# Altium PCB reflex_beta.PcbDoc (part 2 of 2)
Units mil, origin at the board's own origin, x right, y up, seen from the top; angles counter-clockwise.
Board outline 1299.21 x 1771.65 mil, 6 copper layers (Top Layer, Power Plane, Routing_1, Routing_2, Ground Plane, Bottom Layer), stack 48.468 mil thick; 106 components, 94 nets, 473 pads, 173 vias.
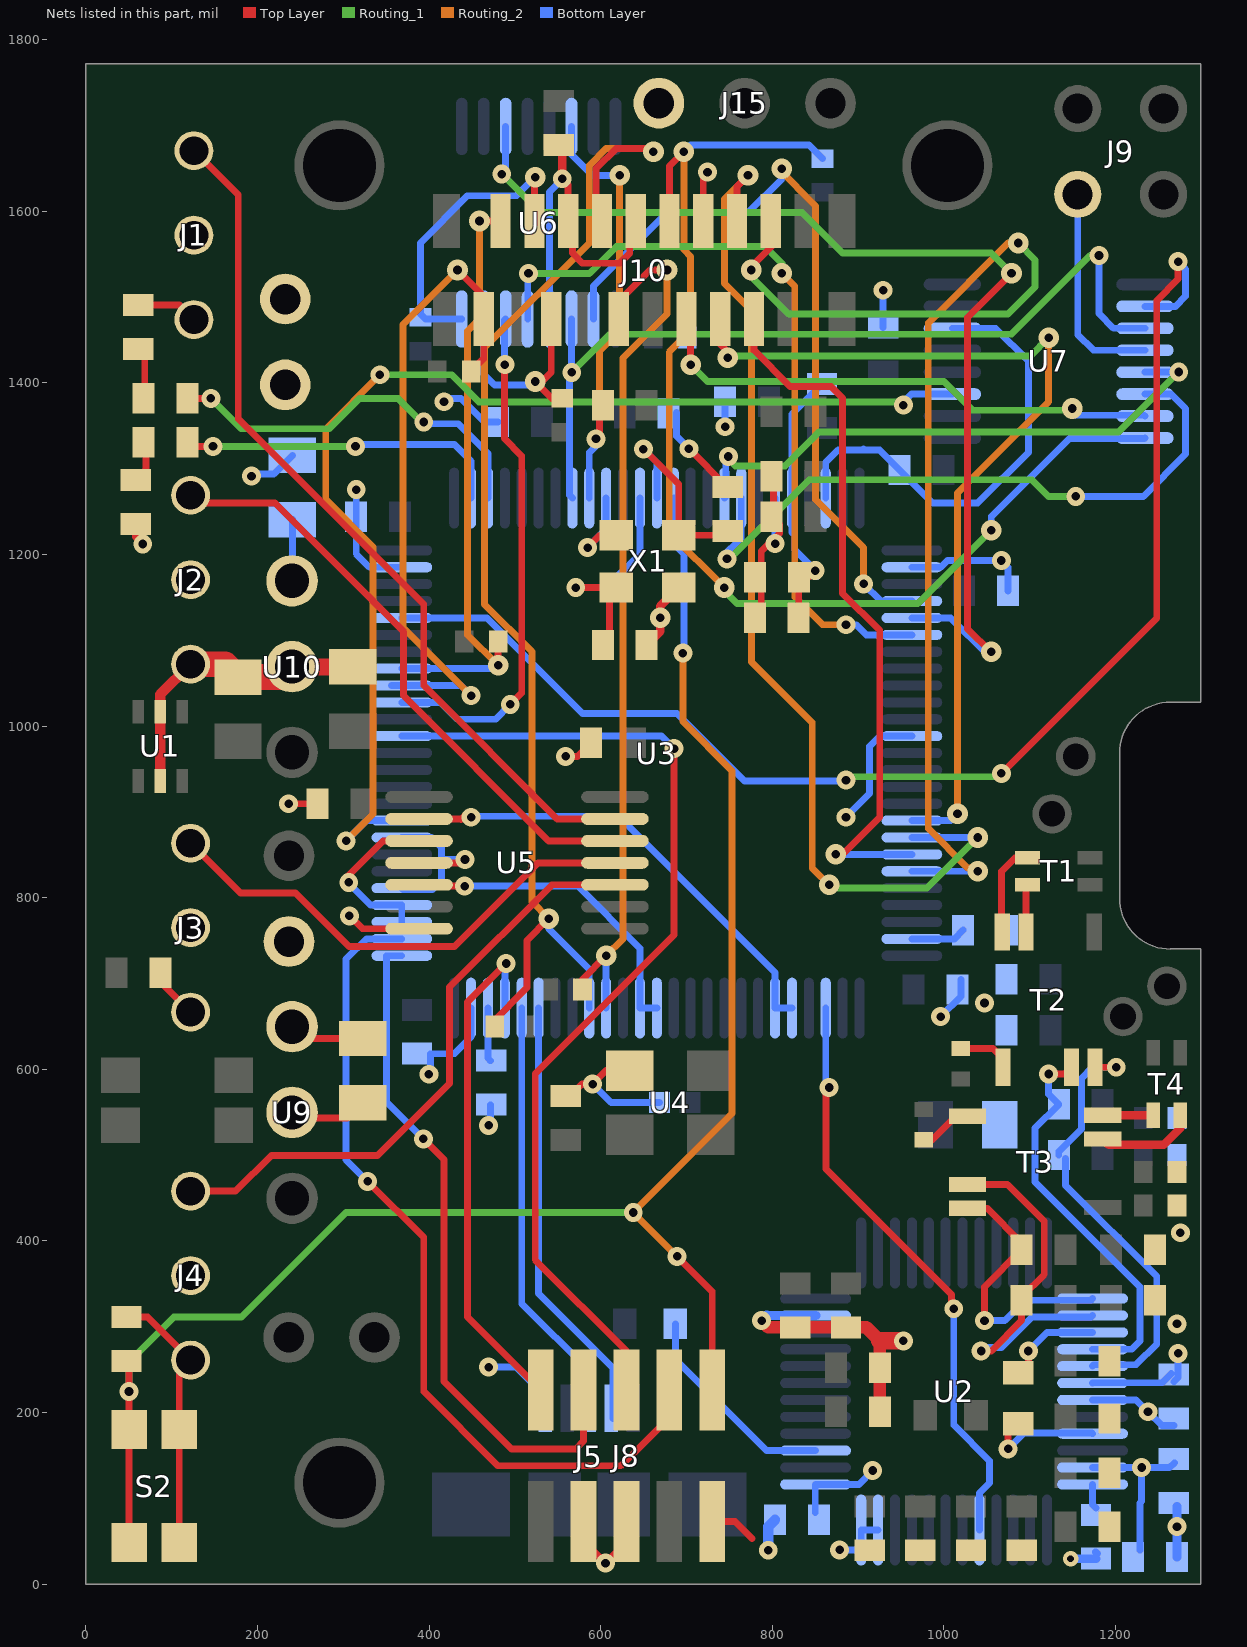
[diagram p6: the nets of this part, all layers, seen from the top]

## Via types
v1: diameter 22, hole 10, Top Layer to Bottom Layer, 110 vias
v2: diameter 24, hole 10, Top Layer to Bottom Layer, 18 vias
v3: diameter 22, hole 10, Top Layer to Bottom Layer, tented top, 16 vias
v4: diameter 24, hole 10, Top Layer to Bottom Layer, tented top, 13 vias
v5: diameter 22, hole 10, Top Layer to Bottom Layer, tented both sides, 9 vias
v6: diameter 24, hole 10, Top Layer to Bottom Layer, tented both sides, 3 vias
v7: diameter 22, hole 10, Top Layer to Bottom Layer, tented bottom, 2 vias
v8: diameter 26, hole 14, Top Layer to Bottom Layer, 1 vias
v9: diameter 18, hole 8, Top Layer to Bottom Layer, 1 vias

## Nets (pads, with @x,y where several pads share a name; then routed paths per layer and width w, separated by ;. In a path a pad name is that pad's centre, name@x,y a point inside that pad or via, vN(x,y) a via of type N, cw(c..) or ccw(c..) an arc to the next point about the centre after c; other vN are vias at no path point) (continued)
GND: C1.1 C2.1 C3.2 C4.1 C5.1 C6.1 C7.1 C8.1 C9.1 C10.1 C11.1 C12.1 C13.1 C14.1 C15.1 C16.1 C17.1 C18.1 C19.1 C20.1 C21.1 C22.1 C23.1 C24.1 C25.1 C26.1 C27.1 C28.1 C29.1 C30.1 C31.1 C32.1 C33.1 C34.1 C35.1 C36.1 C37.1 C38.1 C39.2 C40.2 C41.1 C42.1 C43.1 C44.2 C45.2 C46.2 C47.1 C48.1 C49.2 C50.2 J1.1 J2.1 J3.1 J4.1 J5.5 J6.2 J8.3 J8.5 J8.9 J9.2 J10.6 J10.10 J10.14 J11.2 J15.3 R4.1 R6.1 R9.1 R10.1 R11.1 R14.1 S2.2 U1.2 U1.5 U2.15 U2.19 U2.35 U2.36 U2.47 U3.10 U3.20 U3.27 U3.37 U3.74 U3.99 U4.2 U5.7 U6.4 U7.4 U9.2 U10.2 X1.2 X1.4 | length 4314.4
  Top Layer w8: C35.1@47.24,311.02 72.01,311.02 J4.1@121.93,261.1 108.76,247.93 S2.2@108.76,180.12 S2.2@108.76,48.23 ; R4.1@57.87,1235.43 57.87,1220.47 v1(66.14,1212.2) ; R6.1@61.02,1490.55 109.02,1490.55 J1.1@125.87,1473.7 ; R11.1@86.61,712.6 86.61,701.93 J3.1@121.93,666.61 ; v3(236.22,909.45) C46.2@269.69,909.45 ; U9.2@240.16,549.61 246.46,543.31 304.72,543.31 C44.2@322.44,561.02 ; v1(307.09,778.74) 322.05,763.78 U5.7@388.19,763.78 ; v1(555.12,1637.8) 562.01,1630.91 J10.6@562.01,1588.58 ; v1(559.06,964.57) 572.83,964.57 C47.1@588.58,980.32 ; R14.1@562.99,567.72 577.95,582.68 v1(590.55,582.68) 606.3,598.43 U4.2@633.86,598.43 ; J10.6@566.93,1578.74 566.93,1551.18 578.74,1539.37 622.05,1539.37 633.86,1551.18 J10.10@633.86,1574.8 ; J8.3@579.92,72.83 579.92,50 v1(605.51,24.41) 629.92,48.82 J8.5@629.92,72.83 ; v1(584.65,1207.87) 599.21,1222.44 X1.2@618.11,1222.44 ; J10.10@639.95,1587.79 J10.10@640.75,1588.58 ; X1.4@685.04,1155.51 X1.4@690.94,1161.42 ; v1(702.76,1323.23) 747.24,1278.74 C40.2@748.03,1278.74 ; J10.14@719.49,1588.58 719.49,1640.75 v3(724.41,1645.67) ; J8.9@729.92,72.83 756.69,72.83 776.38,53.15 ; C2.1@787.01,1125.59 787.01,1203.54 808.66,1225.2 808.66,1234.25 800.39,1242.52 801.18,1243.31 801.18,1287.01 C26.1@800.79,1287.4 ; v5(878.35,39.76) v5@878.74,39.37 ; R9.1@1086.61,246.06 1098.43,257.87 v1(1098.43,271.65)
  Top Layer w10: C41.1@551.18,1677.17 555.12,1673.23 v1(555.12,1637.8) ; C39.2@653.54,1094.49 669.29,1110.24 669.29,1139.76 X1.4@685.04,1155.51
  Top Layer w12: U1.2@86.61,936.02 86.61,1036.81 J2.1@121.93,1072.13
  Top Layer w15: v1(787.4,307.09) 795.28,299.21 C23.1@826.77,299.21 C24.1@885.83,299.21 909.45,299.21 925.2,283.46 C22.1@925.2,251.97 C21.1@925.2,200.79
  Top Layer w20: U10.2@240.55,1068.9 C49.2@311.02,1068.9 ; 925.2,283.46 v1(952.76,283.46)
  Top Layer w30: J2.1@121.93,1072.13 162.13,1072.13 C50.2@177.17,1057.09 228.74,1057.09 U10.2@240.55,1068.9
  Bottom Layer w8: v1@194.09,1293.7 218.9,1293.7 C45.2@240.55,1315.35 ; v1(314.96,1275.59) C10.1@314.96,1244.09 314.96,1200.79 330.71,1185.04 U3.99@368.11,1185.04 ; v1(399.61,594.09) 401.57,596.06 401.57,618.11 429.53,618.11 448.82,637.4 U3.74@448.82,671.26 ; v1@413.39,1381.89 437.01,1381.89 464.57,1354.33 C11.1@480.32,1354.33 ; v1(469.29,252.76) 501.18,252.76 535.43,218.5 J5.5@535.43,192.91 ; v1(469.29,534.65) 471.65,537.01 C37.1@471.65,558.66 ; U6.4@540.35,1474.41 540.35,1622.55 547.62,1629.82 547.62,1630.3 v1(555.12,1637.8) ; v1(584.65,1207.87) 606.3,1229.53 U3.10@606.3,1265.75 ; v1(590.55,582.68) 612.2,561.02 C36.1@668.5,561.02 ; C43.1@688.19,1365.35 688.19,1337.8 v1(702.76,1323.23) ; v1(744.88,1348.82) C12.1@744.88,1377.95 ; v1@803.15,1219.68 U3.20@803.15,1265.75 ; v5(878.35,39.76) 903.54,39.76 U2.36@903.54,62.99 U2.35@923.23,62.99 ; v1(885.83,893.7) 913.39,921.26 913.39,976.38 925.2,988.19 U3.37@962.6,988.19 ; C42.1@929.13,1464.57 v1(929.13,1507.87) ; U3.27@962.6,1185.04 996.06,1185.04 1004.16,1193.13 1066.71,1193.13 1074.8,1185.04 C7.1@1074.8,1157.48 ; v5(996.06,661.42) 1019.68,685.04 C8.1@1019.68,704.72 ; v1(1098.43,271.65) 1120.08,293.31 U2.15@1173.23,293.31 ; J9.2@1155.91,1619.68 1155.91,1456.3 1174.21,1437.99 U7.4@1234.25,1437.99 ; U2.19@1173.23,214.57 1224.02,214.57 v5(1237.8,200.79) 1253.94,184.65 C3.2@1268.11,184.65 ; R10.1@1176.38,37.4 1177.17,37.4 R10.1@1179.13,35.43
  Bottom Layer w10: v9(1147.64,29.53) R10.1@1177.17,29.53 ; C6.1@1271.65,31.5 v5(1271.65,66.93) C5.1@1271.65,90.55
  Bottom Layer w11: v1@793.31,312.99 U2.47@850.39,312.99
  Bottom Layer w12: v1(787.4,307.09) v1@793.31,312.99 ; v5(795.28,39.37) 795.28,66.93 C4.1@803.15,74.8
  other v1: 1271.65,303.15 1047.24,677.17 803.15,1212.6 192.91,1291.34 417.32,1377.95
  other v2: 669.29,1125.98
  other v3: 1066.93,1192.91
  other v7: 1275.59,409.45
I2C1_SCL: J10.1 R16.1 U3.92 | length 795.1
  Top Layer w8: v2(433.07,1531.49) 463.58,1500.98 J10.1@463.58,1474.41 463.58,1428.15 R16.1@448.82,1413.39
  Routing_2 w8: v2@437.01,1527.56 v2(433.07,1531.49) 369.52,1467.94 369.52,1114.73 v1(448.82,1035.43)
  Bottom Layer w8: U3.92@356.3,1047.24 U3.92@368.11,1047.24 437.01,1047.24 v1(448.82,1035.43)
I2C1_SDA: J10.2 R17.1 U3.93 | length 704.1
  Top Layer w8: v2(458.66,1588.58) J10.2@483.27,1588.58 ; v2(480.31,1070.86) R17.1@480.31,1098.43
  Routing_2 w8: v2(458.66,1588.58) 458.66,1474.41 444.88,1460.63 444.88,1106.3 v2(480.31,1070.86)
  Bottom Layer w8: U3.93@368.11,1066.93 476.38,1066.93 v2(480.31,1070.86)
I2C2_INT: R12.1 U3.9 U6.14 | length 547.1
  Top Layer w8: v1(594.49,1334.65) 598.43,1330.71 598.43,1370.08 R12.1@602.36,1374.02 R12.1@602.36,1370.08
  Routing_2 w8: v1(594.49,1334.65) 598.43,1338.58 598.43,1437.01 622.05,1460.63 v4(622.05,1641.73)
  Bottom Layer w8: U6.14@565.94,1698.82 565.94,1666.34 590.55,1641.73 v4(622.05,1641.73) ; U3.9@586.61,1265.75 586.61,1318.9 598.43,1330.71 v1(594.49,1334.65)
I2C2_SCL: J10.4 R18.1 U6.8 | length 350.6
  Top Layer w8: J10.4@522.64,1588.58 522.64,1638.78 v2(523.62,1639.76)
  Bottom Layer w8: U6.8@437.99,1474.41 395.67,1474.41 389.76,1480.31 389.76,1562.99 444.88,1618.11 501.97,1618.11 v2(523.62,1639.76)
I2C2_SDA: J10.5 R19.1 U6.7 | length 250.2
  Top Layer w8: J10.5@542.32,1474.41 542.32,1412.4 527.56,1397.64 543.31,1381.89 R19.1@555.12,1381.89
  Bottom Layer w8: U6.7@463.58,1474.41 463.58,1410.43 476.38,1397.64 v2@527.56,1397.64
  other v2: 523.62,1401.57
I2C3_SCL: J10.8 R20.1 U3.67 | length 1464.6
  Top Layer w8: R20.1@472.44,653.54 514.01,695.11 514.01,750.23 v2(539.37,775.59) ; J10.8@601.38,1588.58 594.49,1595.47 594.49,1649.61 618.11,1673.23 v4@665.35,1673.23
  Routing_2 w8: v2(539.37,775.59) 519.68,795.28 519.68,1086.61 464.57,1141.73 464.57,1440.94 586.61,1562.99 586.61,1653.54 606.3,1673.23 v4@665.35,1673.23
  Bottom Layer w8: v2(539.37,775.59) 539.37,763.78 586.61,716.54 U3.67@586.61,671.26
  other v4: 661.42,1669.29
I2C3_SDA: J10.9 R21.1 U3.66 | length 1032.4
  Top Layer w8: R21.1@578.74,692.91 578.74,704.72 v2(606.3,732.28) ; J10.9@621.06,1474.41 621.06,1495.32 657.24,1531.5 v2(677.17,1531.5)
  Routing_2 w8: v2(606.3,732.28) 625.98,751.97 625.98,1429.13 677.17,1480.31 v2(677.17,1531.5)
  Bottom Layer w8: U3.66@606.3,671.26 v2(606.3,732.28)
I2C4_INT: R15.1 U3.23 U7.14 | length 546.1
  Bottom Layer w8: U3.23@862.2,1265.75 862.2,1307.09 876.77,1321.65 925.11,1321.65 R15.1@948.34,1298.43 986.93,1259.84 1039.37,1259.84 1098.43,1318.9 1098.43,1425.2 1060.04,1463.58 U7.14@1009.84,1463.58 ; 905.12,1321.65 906.3,1322.83
I2C4_SCL: J10.12 R22.1 U7.8 | length 1401.9
  Top Layer w8: J10.12@680.12,1588.58 680.12,1652.56 v4(696.85,1669.29)
  Routing_1 w8: v2@748.03,1165.35 748.03,1153.54 758.83,1142.75 969.52,1142.75 v4(1055.12,1228.35)
  Routing_2 w8: v4@699.17,1666.97 v4(696.85,1669.29) 696.85,1555.12 704.72,1547.24 704.72,1460.63 679.76,1435.66 679.76,1225.76 v2(744.09,1161.42)
  Bottom Layer w8: v4(696.85,1669.29) 704.73,1677.17 842.52,1677.17 R22.1@858.27,1661.42 ; v4(1055.12,1228.35) 1055.12,1244.09 1146.06,1335.03 1233.66,1335.03 U7.8@1234.25,1335.63
I2C4_SDA: J10.13 R23.1 U7.7 | length 656
  Top Layer w8: J10.13@699.8,1484.25 699.8,1479.33 704.72,1474.41 v6(704.72,1421.26)
  Routing_1 w8: v6(704.72,1421.26) 724.41,1401.57 1000,1401.57 1033.46,1368.11 v4@1147.64,1368.11
  Bottom Layer w8: v6(704.72,1421.26) R23.1@704.72,1460.63 ; v4@1149.61,1366.14 1153.54,1362.2 1233.27,1362.2 U7.7@1234.25,1361.22
  other v4: 1149.61,1370.08
I2C_EXT_R\E\S\E\T: U3.8 U6.3 U7.3 | length 1010.6
  Routing_1 w8: v1(566.14,1412.2) 610.63,1456.69 1078.74,1456.69 1170.47,1548.43 v3(1180.71,1548.43)
  Bottom Layer w8: v1@565.94,1410.43 U6.3@565.94,1474.41 ; v1(566.14,1412.2) 563.61,1409.68 563.61,1269.06 U3.8@566.93,1265.75 ; v3@1180.71,1546.85 1180.71,1480.71 1197.83,1463.58 U7.3@1234.25,1463.58
LED0: D1.1 U3.2 | length 380.9
  Top Layer w8: D1.1@121.26,1331.89 127.17,1325.98 v1(148.03,1325.98)
  Routing_1 w8: v1(148.03,1325.98) v1(314.17,1325.98)
  Bottom Layer w8: v1@314.17,1327.95 429.53,1327.95 448.82,1308.66 U3.2@448.82,1265.75
LED1: D2.1 U3.3 | length 462
  Top Layer w8: D2.1@119.68,1382.28 120.08,1381.89 v1(145.67,1381.89)
  Routing_1 w8: v1(145.67,1381.89) 181.1,1346.46 283.46,1346.46 318.9,1381.89 363.77,1381.89 391.34,1354.33 v1(393.7,1354.33)
  Bottom Layer w8: v1@387.8,1352.36 433.86,1352.36 468.5,1317.72 U3.3@468.5,1265.75
MCU_NRST: C35.2 J8.10 S2.1 U3.14 | length 2061.1
  Top Layer w8: C35.2@47.24,259.84 50.2,256.89 v1(50.2,224.41) S2.1@50.2,180.12 S2.1@50.2,48.23 ; v1(688.98,381.89) 729.92,340.94 J8.10@729.92,226.38
  Routing_1 w8: v1(50.2,224.41) 50.2,258.86 102.36,311.02 181.1,311.02 303.15,433.07 v1(637.8,433.07) v1@639.37,433.07
  Routing_2 w8: v1(688.98,381.89) v1(637.8,433.07) 753.13,548.41 753.13,947.65 695.67,1005.12 v1(695.67,1085.04)
  Bottom Layer w8: U3.14@685.04,1265.75 685.04,1212.6 696.85,1200.79 696.85,1092.13 v1@692.91,1088.19
NetC1_2: C1.2 C2.2 R1.1 U3.21 | length 320.3
  Top Layer w8: C2.2@830.71,1126.77 C1.2@830.71,1173.23 ; C1.2@831.89,1174.41 C1.2@831.1,1173.62 842.52,1173.62 v1(850,1181.1) v1@850.39,1181.1
  Bottom Layer w8: v1@847.2,1179.57 v1@852.36,1174.41 ; v1(850,1181.1) 826.15,1204.95 826.15,1222.13 822.83,1225.44 U3.21@822.83,1265.75 822.83,1354.39 822.86,1363.41 R1.1@857.87,1398.43
NetC3_1: C3.1 C4.2 C5.2 C6.2 U2.18 U2.23 U2.37 | length 432.1
  Bottom Layer w8: C4.2@850,83.07 U2.37@850,115.75 ; U2.37@850.39,116.14 900.79,116.14 v1(916.93,132.28) ; U2.23@1173.23,135.83 1262.99,135.83 C5.2@1268.5,141.34 ; U2.18@1173.23,234.25 1173.51,234.54 1254.22,234.54 C3.1@1264.96,245.28 ; C6.2@1228.35,39.37 1228.35,94.49 1230.32,96.46 v5(1230.32,135.83) ; C3.1@1268.11,235.83 1272.83,240.55 v5(1272.83,268.9)
NetC37_2: C37.2 U3.73 | length 62.7
  Bottom Layer w8: U3.73@468.5,671.26 468.5,612.99 C37.2@471.65,609.84
NetC38_2: C38.2 U3.49 | length 64.1
  Bottom Layer w8: U3.49@962.6,751.97 1012.2,751.97 C38.2@1022.44,762.2
NetD1_2: D1.2 R4.2 | length 50.3
  Top Layer w8: R4.2@57.87,1286.61 70.08,1298.82 D1.2@70.08,1331.89
NetD2_2: D2.2 R6.2 | length 60.2
  Top Layer w8: R6.2@61.02,1439.37 68.5,1431.89 D2.2@68.5,1382.28
NetR9_2: R9.2 U2.21 | length 140.8
  Top Layer w8: v1(1074.8,157.48) 1074.8,175.2 R9.2@1086.61,187.01
  Bottom Layer w8: v1(1074.8,157.48) 1093.32,176 1172.43,176 U2.21@1173.23,175.2
NetR10_2: R10.2 U2.24 | length 29.2
  Bottom Layer w8: U2.24@1173.23,116.14 1173.23,92.52 R10.2@1177.17,88.58
NetR13_1: R13.1 U2.39 | length 248.8
  Bottom Layer w8: R13.1@687.01,303.15 687.01,261.81 793.31,155.51 U2.39@850.39,155.51
NetR24_1: R24.1 T2.3 | length 63.9
  Top Layer w8: R24.1@1019.68,624.02 1057.09,624.02 1068.9,612.2 T2.3@1068.9,602.36
NetR25_1: R25.1 T3.3 | length 62.6
  Top Layer w8: R25.1@976.38,517.72 986.22,517.72 1013.78,545.28 T3.3@1027.56,545.28
NetT1_1: T1.1 T2.4 | length 108.3
  Top Layer w8: T2.4@1067.91,759.84 1066.93,760.83 1066.93,830.71 1082.68,846.46 T1.1@1097.44,846.46
NetT1_2: T1.2 T2.5 | length 53.1
  Top Layer w8: T2.5@1095.47,759.84 T1.2@1095.47,812.99
NetT3_4: T3.4 T4.1 | length 59.1
  Top Layer w10: T3.4@1185.04,546.26 T4.1@1244.09,546.26
NetT3_5: T3.5 T4.2 | length 116.3
  Top Layer w10: T3.5@1185.04,518.7 1191.93,511.81 1255.91,511.81 1275.59,531.5 T4.2@1275.59,546.26
OSC_IN: C39.1 U3.12 X1.3 | length 250.6
  Top Layer w8: v1(570.87,1161.42) X1.3@618.11,1161.42 ; C39.1@610.24,1106.3 X1.3@610.24,1153.54
  Bottom Layer w8: v1(570.87,1161.42) 606.3,1161.42 645.67,1200.79 U3.12@645.67,1265.75
OSC_OUT: C40.1 U3.13 X1.1 | length 240.3
  Top Layer w8: v1(649.61,1322.83) 690.94,1281.5 X1.1@690.94,1222.44 742.91,1222.44 C40.1@748.03,1227.56
  Bottom Layer w8: v1(649.61,1322.83) 665.35,1307.09 U3.13@665.35,1265.75
PHY_RESET: U2.29 U3.53 | length 694.3
  Top Layer w8: v1@862.6,581.5 862.6,581.1 862.6,483.86 1008.86,337.6 1008.86,323.43 v1(1011.42,320.87)
  Bottom Layer w8: U3.53@862.2,671.26 862.2,581.5 862.6,581.1 v1@863.78,579.92 ; v1(1011.42,320.87) 1011.42,185.43 1053.17,143.69 1053.17,117.97 1041.34,106.14 U2.29@1041.34,62.99
  other v1: 866.14,578.74
PHY_RXM: R7.1 T3.1 U2.13 | length 324.8
  Top Layer w8: T3.1@1027.56,437.99 1050.2,437.99 1090.55,397.64 R7.1@1090.55,389.76 1047.24,346.46 v1(1047.24,307.09)
  Bottom Layer w8: v1(1047.24,307.09) 1070.87,307.09 1094.49,330.71 1171.26,330.71 U2.13@1173.23,332.68
PHY_RXP: R5.2 T3.2 U2.14 | length 440.8
  Top Layer w8: T3.2@1027.56,465.55 1073.82,465.55 1116.94,422.43 1116.94,361.03 1090.55,334.65 R5.2@1090.55,330.71 1090.55,307.09 1055.12,271.65 v1(1043.31,271.65)
  Bottom Layer w8: v1@1043.31,275.59 1066.93,275.59 1102.36,311.02 1171.26,311.02 U2.14@1173.23,312.99
PHY_TXM: R3.1 T2.2 U2.16 | length 466.9
  Top Layer w8: v1(1122.05,594.49) 1140.75,594.49 T2.2@1148.62,602.36
  Bottom Layer w8: v1(1122.05,594.49) 1122.05,570.87 R3.1@1133.86,559.06 1106.3,531.5 1106.3,468.5 1228.35,346.46 1228.35,283.46 1218.5,273.62 U2.16@1173.23,273.62
PHY_TXP: R2.2 T2.1 U2.17 | length 516.6
  Top Layer w8: T2.1@1176.18,602.36 v1(1200.79,602.36)
  Bottom Layer w8: R2.2@1133.86,500 1133.86,503.94 1160.24,530.32 1160.24,589.38 1173.23,602.36 v1(1200.79,602.36) ; R2.2@1141.73,496.06 1141.73,464.57 1248.03,358.27 1248.03,279.92 1223.73,255.62 1174.91,255.62 U2.17@1173.23,253.94
SPI1_MISO: U3.31 U6.5 | length 918.7
  Routing_1 w8: v1(515.75,1527.56) 586.61,1527.56 618.11,1559.06 791.34,1559.06 811.02,1539.37 v2(811.02,1527.56)
  Routing_2 w8: v2(811.02,1527.56) 826.15,1512.43 826.15,1150.23 858.27,1118.11 v3(885.83,1118.11)
  Bottom Layer w8: U6.5@514.96,1474.61 v1@514.96,1526.77 ; v3(885.83,1118.11) 897.64,1118.11 909.45,1106.3 U3.31@962.6,1106.3
SPI1_MOSI: U3.91 U6.6 | length 611.2
  Top Layer w8: v1(488.19,1421.26) 488.19,1423.62 487.8,1424.02 487.8,1335.04 507.87,1314.96 507.87,1038.58 v1(494.49,1025.2)
  Bottom Layer w8: U3.91@368.11,1027.56 413.39,1027.56 433.07,1007.87 477.17,1007.87 v1(494.49,1025.2) ; v1(488.19,1421.26) 488.19,1423.62 487.8,1424.02 487.8,1473.03 U6.6@489.17,1474.41
SPI1_NSS: U3.29 U6.2 | length 915
  Routing_2 w8: v4(811.02,1649.61) 807.09,1649.61 850.39,1606.3 850.39,1263.78 906.3,1207.87 v3(906.3,1165.75)
  Bottom Layer w8: U6.2@591.54,1474.41 591.54,1512.8 677.17,1598.43 771.65,1598.43 811.02,1637.8 v4(811.02,1649.61) ; v3(906.3,1165.75) 926.38,1145.67 U3.29@962.6,1145.67
SPI1_SCLK: U3.30 U6.11 | length 1285.4
  Top Layer w8: v4@1054.6,1086.1 1027.56,1113.14 1027.56,1476.38 v4(1078.74,1527.56)
  Routing_1 w8: v1(484.65,1643.31) 529.53,1598.43 834.65,1598.43 881.89,1551.18 1055.11,1551.18 v4(1078.74,1527.56)
  Bottom Layer w8: v1(484.65,1643.31) 489.17,1647.83 U6.11@489.17,1698.82 ; U3.30@962.6,1125.98 1007.87,1125.98 1051.18,1082.68 v4(1055.12,1086.61)
SPI2_MISO: U3.17 U7.5 | length 672.4
  Routing_1 w8: v1(748.76,1314.18) 745.75,1314.18 756.78,1303.15 814.96,1303.15 854.33,1342.52 1203.54,1342.52 v3(1273.62,1412.6)
  Bottom Layer w8: U3.17@744.09,1265.75 745.75,1267.4 745.75,1314.18 v1(748.76,1314.18) ; U7.5@1234.25,1412.4 1234.45,1412.6 v3(1273.62,1412.6)
SPI2_MOSI: U3.18 U7.6 | length 787.3
  Routing_1 w8: v1(747.13,1194.76) 750.28,1194.76 842.5,1286.99 1102.77,1286.99 1122.05,1267.72 v3@1149.61,1267.72
  Bottom Layer w8: v1@740.85,1196.36 763.78,1219.29 U3.18@763.78,1265.75 ; v3@1149.61,1267.72 1232.28,1267.72 1281.72,1317.15 1281.72,1369.87 1264.78,1386.81 U7.6@1234.25,1386.81
  other v3: 1153.54,1267.72
SPI2_NSS: U3.96 U7.2 | length 1559
  Top Layer w8: v1(1066.93,944.88) 1248.03,1125.98 1248.03,1496.06 1272.83,1520.87 v3(1272.83,1541.34)
  Routing_1 w8: v1(885.83,937.01) 889.76,940.94 1062.99,940.94 v1(1066.93,944.88)
  Bottom Layer w8: U3.96@368.11,1125.98 467.32,1125.98 578.74,1014.57 688.98,1014.57 767.72,935.82 v1@885.83,935.82 ; U7.2@1234.25,1489.17 1269.92,1489.17 1281.72,1500.97 1281.72,1532.46 v3(1272.83,1541.34)
SPI2_SCLK: U3.84 U7.11 | length 1366.7
  Routing_1 w8: v1(342.52,1409.45) 425.98,1409.45 457.86,1377.57 v1@952.57,1377.57
  Routing_2 w8: v1(303.15,866.14) 334.65,897.64 334.65,1208.66 279.53,1263.78 279.53,1346.46 v1(342.52,1409.45)
  Bottom Layer w8: v1(303.15,866.14) 326.77,889.76 U3.84@368.11,889.76 ; v1@950.98,1375.79 962.01,1386.81 U7.11@1009.84,1386.81
  other v1: 952.76,1374.02
SPI4_MISO: J10.17 U3.44 | length 827
  Top Layer w8: J10.17@778.54,1474.41 778.54,1437.99 820.68,1395.86 868.16,1395.86 881.89,1382.13 881.89,1154.57 925.2,1111.27 925.2,893.7 881.89,850.39 v2(874.02,850.39)
  Bottom Layer w8: v2(874.02,850.39) U3.44@962.6,850.39
SPI4_MOSI: J10.18 U3.45 | length 1393.5
  Top Layer w8: v2(775.59,1531.5) 775.59,1535.43 798.23,1558.07 J10.18@798.23,1588.58
  Routing_1 w8: v2(775.59,1531.5) 775.59,1523.62 818.9,1480.32 1074.8,1480.32 1106.3,1511.81 1106.3,1543.31 v4(1086.61,1562.99)
  Routing_2 w8: v2@1043.31,834.65 1027.56,834.65 981.72,880.48 981.72,1469.91 1074.8,1562.99 v4(1086.61,1562.99)
  Bottom Layer w8: U3.45@962.6,830.71 v2@1047.24,830.71
  other v2: 1039.37,830.71
SPI4_NSS: J10.15 U3.42 | length 1082.3
  Top Layer w8: J10.15@739.17,1474.41 739.17,1445.02 v6@752.74,1431.45
  Routing_1 w8: v6@752.74,1431.45 1100.74,1431.45 v4(1122.05,1452.76)
  Routing_2 w8: v6(1015.75,897.64) 1015.75,1271.65 1122.05,1377.95 v4(1122.05,1452.76)
  Bottom Layer w8: U3.42@962.6,889.76 1007.87,889.76 v6(1015.75,897.64)
  other v6: 748.03,1429.13
SPI4_SCLK: J10.16 U3.43 | length 1223.3
  Top Layer w8: J10.16@758.86,1588.58 758.86,1628.94 v4(771.65,1641.73)
  Routing_1 w8: v2@870.08,811.02 980.32,811.02 v2(1039.37,870.08)
  Routing_2 w8: v4(771.65,1641.73) 744.09,1614.17 744.09,1515.75 775.59,1484.25 775.59,1074.8 846.46,1003.94 846.46,834.65 v2@870.08,811.02
  Bottom Layer w8: U3.43@962.6,870.08 v2(1039.37,870.08)
  other v2: 866.14,814.96
TCLK: J8.4 U3.76 | length 800.3
  Top Layer w8: v1(393.31,518.9) 417.32,494.88 417.32,236.22 496.06,157.48 570.87,157.48 579.92,166.54 J8.4@579.92,226.38
  Bottom Layer w8: U3.76@368.11,732.28 350.39,732.28 350.39,561.81 v1(393.31,518.9)
TDI: J8.8 U3.77 | length 993.7
  Top Layer w8: v1(328.35,469.29) 393.7,403.94 393.7,224.41 480.32,137.8 623.34,137.8 679.92,194.37 J8.8@679.92,226.38
  Bottom Layer w8: v1(328.35,469.29) 303.15,494.49 303.15,728.35 326.77,751.97 U3.77@368.11,751.97
TDO: J8.6 U3.89 | length 1181.7
  Top Layer w8: J8.6@629.92,226.38 629.92,271.65 523.62,377.95 523.62,594.49 685.43,756.3 v1(685.43,973.62)
  Bottom Layer w8: U3.89@368.11,988.19 670.87,988.19 v1(685.43,973.62)
TMS: J8.2 U3.72 | length 603.3
  Top Layer w8: v1(489.76,723.23) 444.88,678.35 444.88,311.42 J8.2@529.92,226.38
  Bottom Layer w8: U3.72@488.19,671.26 488.19,721.65 v1(489.76,723.23)
UART3_DATA_A: U3.55 U3.56 U5.2 | length 546
  Top Layer w8: U5.2@388.19,891.73 437.8,891.73 ; 437.01,890.94 v1@440.94,894.88
  Bottom Layer w8: v1@448.82,894.88 620.87,894.88 803.15,712.6 U3.56@803.15,671.26 U3.55@822.83,671.26
  other v1: 448.82,893.7
UART3_DATA_B: J1.3 U5.13 | length 1021.5
  Top Layer w8: J1.3@125.87,1670.55 177.56,1618.86 177.56,1357.87 393.7,1141.73 393.7,1047.24 549.21,891.73 U5.13@616.54,891.73
UART4_DATA_A: U3.78 U3.79 U5.3 | length 200.2
  Top Layer w8: v1(306.3,817.71) 306.3,826.42 346.02,866.14 U5.3@388.19,866.14
  Bottom Layer w8: v1(306.3,817.71) 306.3,816.54 331.5,791.34 U3.79@368.11,791.34 U3.78@368.11,771.65
UART4_DATA_B: J2.3 U5.12 | length 705.3
  Top Layer w8: J2.3@121.93,1268.98 131.06,1259.84 220.47,1259.84 370.08,1110.24 370.08,1035.43 539.37,866.14 U5.12@616.54,866.14
UART5_DATA_A: U3.80 U3.83 U5.4 | length 237.6
  Top Layer w8: U5.4@388.19,840.55 437.8,840.55 v1(441.73,844.49)
  Bottom Layer w8: U3.80@368.11,811.02 369.68,809.45 403.94,809.45 414.17,819.68 414.17,858.66 ; U3.83@368.11,870.08 402.76,870.08 414.17,858.66 ; v1(441.73,844.49) 414.17,844.49 414.17,858.66
UART5_DATA_B: J3.3 U5.11 | length 585
  Top Layer w8: J3.3@121.93,863.47 180.1,805.29 244.32,805.29 306.72,742.89 429.32,742.89 526.98,840.55 U5.11@616.54,840.55
UART6_DATA_A: U3.63 U3.64 U5.5 | length 377.5
  Top Layer w8: U5.5@388.19,814.96 389.76,813.39 v1(441.34,813.39)
  Bottom Layer w8: v1(441.34,813.39) 573.23,813.39 645.67,740.94 U3.64@645.67,671.26 U3.63@665.35,671.26
UART6_DATA_B: J4.3 U5.10 | length 708.3
  Top Layer w8: J4.3@121.93,457.95 174.49,457.95 216.14,499.61 339.83,499.61 423.61,583.38 423.61,695.65 542.91,814.96 U5.10@616.54,814.96
USB_DM: J5.2 U3.70 | length 514.2
  Bottom Layer w8: U3.70@527.56,671.26 527.56,338.58 614.17,251.97 J5.2@614.17,192.91
USB_DP: J5.3 U3.71 | length 511
  Bottom Layer w8: U3.71@507.87,671.26 507.87,326.77 586.61,248.03 J5.3@586.61,192.91
VBAT: C44.1 C45.1 J1.2 J2.2 J3.2 J4.2 J11.1 U9.1 U10.1 | length 159.4
  Top Layer w8: U9.1@240.16,649.61 253.94,635.83 C44.1@322.44,635.83
  Bottom Layer w8: U10.1@240.16,1169.29 240.55,1169.69 C45.1@240.55,1240.55
pads on no net: J5.1 J5.4 J5.TAB J8.7 J10. U1.6 U2.1 U2.5 U2.6 U2.7 U2.8 U2.9 U2.10 U2.11 U2.12 U2.20 U2.25 U2.26 U2.27 U2.28 U2.33 U2.38 U2.41 U2.42 U2.45 U2.46 U3.1 U3.4 U3.5 U3.7 U3.15 U3.38 U3.39 U3.40 U3.41 U3.54 U3.58 U3.60 U3.61 U3.65 U3.68 U3.81 U3.82 U3.85 U3.86 U3.87 U3.88 U3.90 U3.95 U5.6 U5.9 U6.1 U6.9 U6.10 U6.13 U6.15 U6.16 U7.1 U7.9 U7.10 U7.13 U7.15 U7.16
copper on no net: | length 5
  Bottom Layer w8: v1(973.62,618.9) v1@977.17,615.35

## Polygon pours and split planes (outlines as drawn)
3V3 on Mechanical 3 "3V3" (none): 0,0 0,1771.65 1299.21,1771.65 1299.21,1027.56 1263.78,1027.56 1263.78,1027.69 ccw(c1263.78,968.5) 1204.59,968.5 1204.72,968.5 1204.72,799.05 1204.59,799.21 ccw(c1263.78,799.21) 1263.78,740.03 1263.62,740.16 1299.21,740.16 1299.21,0
VBAT on Power Plane "VBAT" (solid, pour order 12): 192.91,0 0,0 0,1771.65 277.95,1771.65 275.59,512.15 275.59,511.81 192.91,511.81
3V3 on Power Plane "3V3" (solid, pour order 8): 275.59,511.81 192.91,511.81 192.91,0 1299.21,0 1299.21,1771.65 275.59,1771.65
GND on Ground Plane "GND" (solid, pour order 10): 0,1771.65 1299.21,1771.65 1299.21,0 0,0
NetC3_1 on Routing_1 "PowerFeedBack" (solid, pour order 11): 840.16,375.59 840.55,375.98 1289.37,375.98 1289.37,14.57 1291.34,12.6 1286.61,17.32 840.55,17.32
3V3 on Top Layer "3v3_top_enet" (solid, pour order 15): 893.7,102.36 921.26,102.36 952.76,133.86 1000,133.86 1000,122.05 1015.75,106.3 1039.37,106.3 1051.18,118.11 1051.18,145.67 1090.55,145.67 1129.92,185.04 1129.92,405.51 1216.54,492.13 1240.16,492.13 1240.16,429.13 1216.54,429.13 1204.72,417.32 1204.72,307.09 1173.23,307.09 1153.54,287.4 1153.54,51.18 1129.92,51.18 1129.92,70.87 1122.05,78.74 893.7,78.74
GND on Top Layer "gnd_top_enet" (solid, pour order 9): 716.54,118.11 826.77,118.11 893.7,51.18 1110.24,51.18 1110.24,39.37 1118.11,31.5 1161.42,31.5 1181.1,51.18 1181.1,279.53 1208.66,279.53 1236.22,307.09 1236.22,401.57 1259.84,425.2 1259.84,492.13 1299.21,492.13 1299.21,0 716.54,0

## Keep-outs
Keep-Out Layer:
  lines w5: 1204.59,799.21 ccw(c1263.78,799.21) 1263.78,740.03 ; 1204.59,968.5 cw(c1263.78,968.5) 1263.78,1027.69 ; 1204.72,799.05 1204.72,968.5 ; 1263.62,740.16 1299.21,740.16 1299.21,0 0,0 0,1771.65 1299.21,1771.65 1299.21,1027.56 1263.78,1027.56

## Other copper
Bottom Layer:
  rectangle net GND: 1259.84,393.7 1287.4,574.8
  region net 3V3: 1114.17,629.92 1165.35,629.92 1165.35,779.53 1114.17,779.53
  region net GND: 1003.94,708.66 1031.5,708.66 1062.99,740.16 1062.99,779.53 1086.61,779.53 1086.61,460.63 1043.31,460.63 1043.31,590.55 988.19,645.67 988.19,665.35 992.13,665.35 1003.94,677.17
  region net 3V3: 1173.23,574.8 1240.16,574.8 1240.16,448.82 1192.91,448.82 1173.23,468.5

## Silkscreen, mask and mechanical layers (free items; w line width, h text height)
Top Overlay:
  lines w5: 23.62,1318.9 23.62,1342.52 ; 23.62,1370.08 23.62,1393.7 ; 23.62,1330.71 43.31,1342.52 43.31,1318.9 23.62,1330.71 ; 23.62,1381.89 43.31,1370.08 43.31,1393.7 23.62,1381.89
  text "GND" at 629.92,1653.54 h40
  text "ANA1" at 728.35,1653.54 h40
  text "ANA0" at 834.65,1653.54 h40
  text "RX" at 1102.36,1507.87 h60
  text "TX" at 1208.66,1507.87 h60
  text "-" at 295.28,1488.19 h30 r90
  text "GND" at 1062.99,1433.07 h60
  text "IO" at 1220.47,1433.07 h60
  text "12VDC" at 322.83,1401.57 h35 r90
  text "+" at 271.65,1397.64 h30
  text "5VDC" at 196.85,1251.97 h35
  text "REFLEX REV C" at 1232.28,1059.06 h40 r90
  text "GM  MQ" at 1275.59,1059.06 h40 r90
  text "b" at 1299.21,1007.87 h300 r90
  text "-" at 1102.36,960.63 h50
  text "TX" at 1086.61,937.01 h30
  text "+" at 1074.8,901.57 h50
  text "+" at 279.92,842.13 h30
  text "-" at 303.15,733.86 h30 r90
  text "RX" at 1196.85,720.47 h30
  text "-" at 1240.16,720.47 h50
  text "+" at 1192.91,688.98 h50
  text "BOOT" at 11.81,625.98 h35
  text "3.3V" at 228.35,377.95 h35
  text "AUX3" at 185.04,208.66 h40
  text "AUX4" at 303.15,208.66 h40
  text "RESET" at 196.85,23.62 h60 r90
Mechanical 1:
  circle w5: c1003.94,1653.54 r64.96
  circle w5: c295.28,1653.54 r64.96
  circle w5: c295.28,118.11 r64.96
Mechanical 3:
  lines w5: 1204.59,799.21 ccw(c1263.78,799.21) 1263.78,740.03 ; 1204.59,968.5 cw(c1263.78,968.5) 1263.78,1027.69 ; 1204.72,799.05 1204.72,968.5 ; 1263.62,740.16 1299.21,740.16 1299.21,0 0,0 0,1771.65 1299.21,1771.65 1299.21,1027.56 1263.78,1027.56